# Altium PCB BCDto7-Bravo.PcbDoc
Units mil, origin at the board's own origin, x right, y up, seen from the top; angles counter-clockwise.
Board outline 3935 x 3935 mil, 2 copper layers (Top Layer, Bottom Layer); 26 components, 50 nets, 228 pads, 0 vias.
Unrouted connection lines stored in the file: 57.
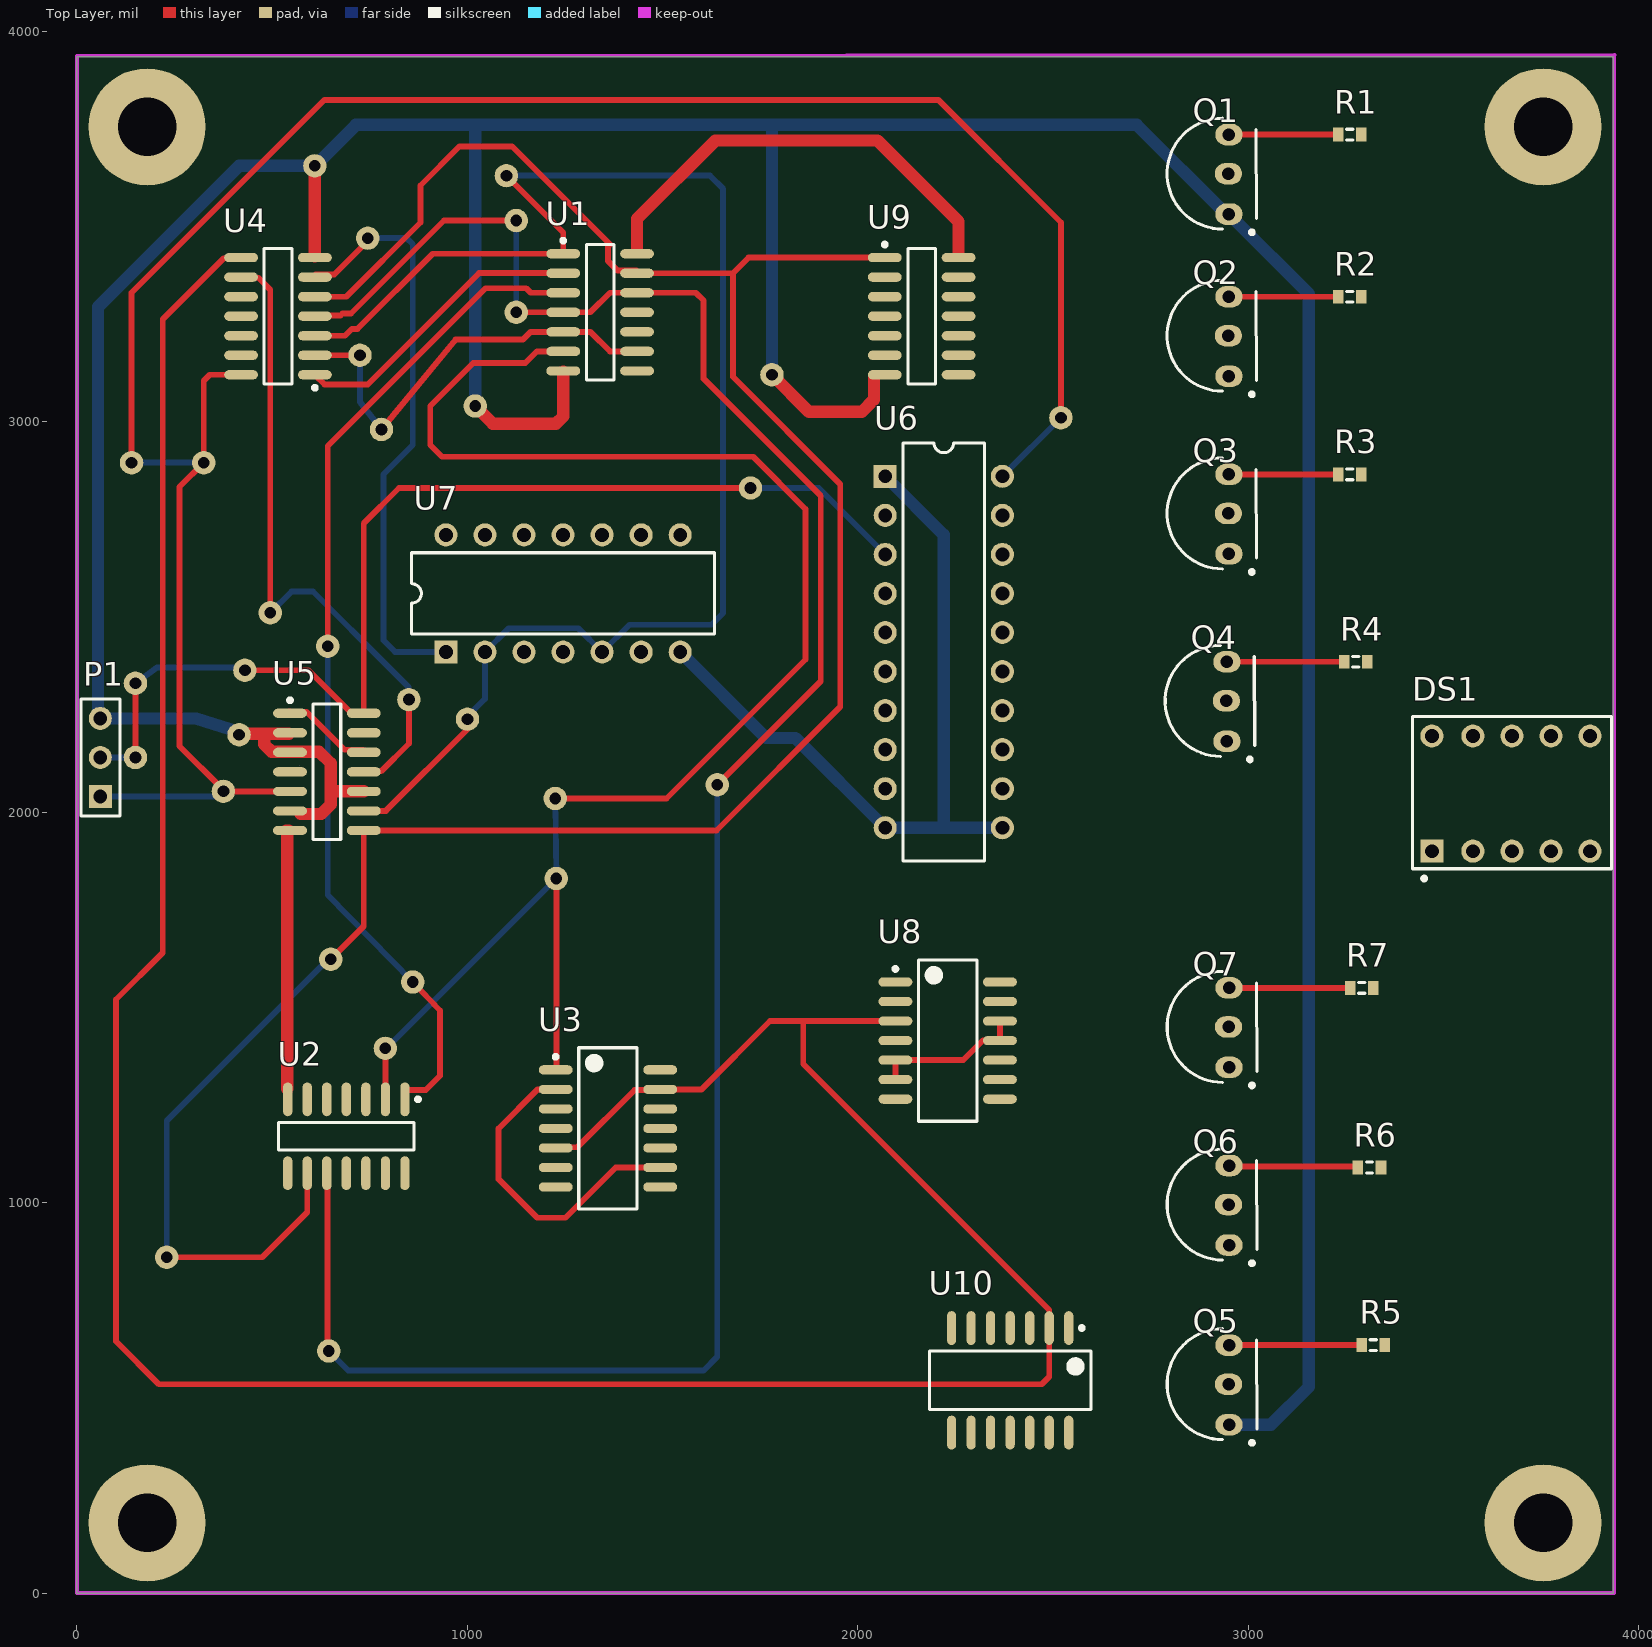
[diagram p0: Top Layer view]
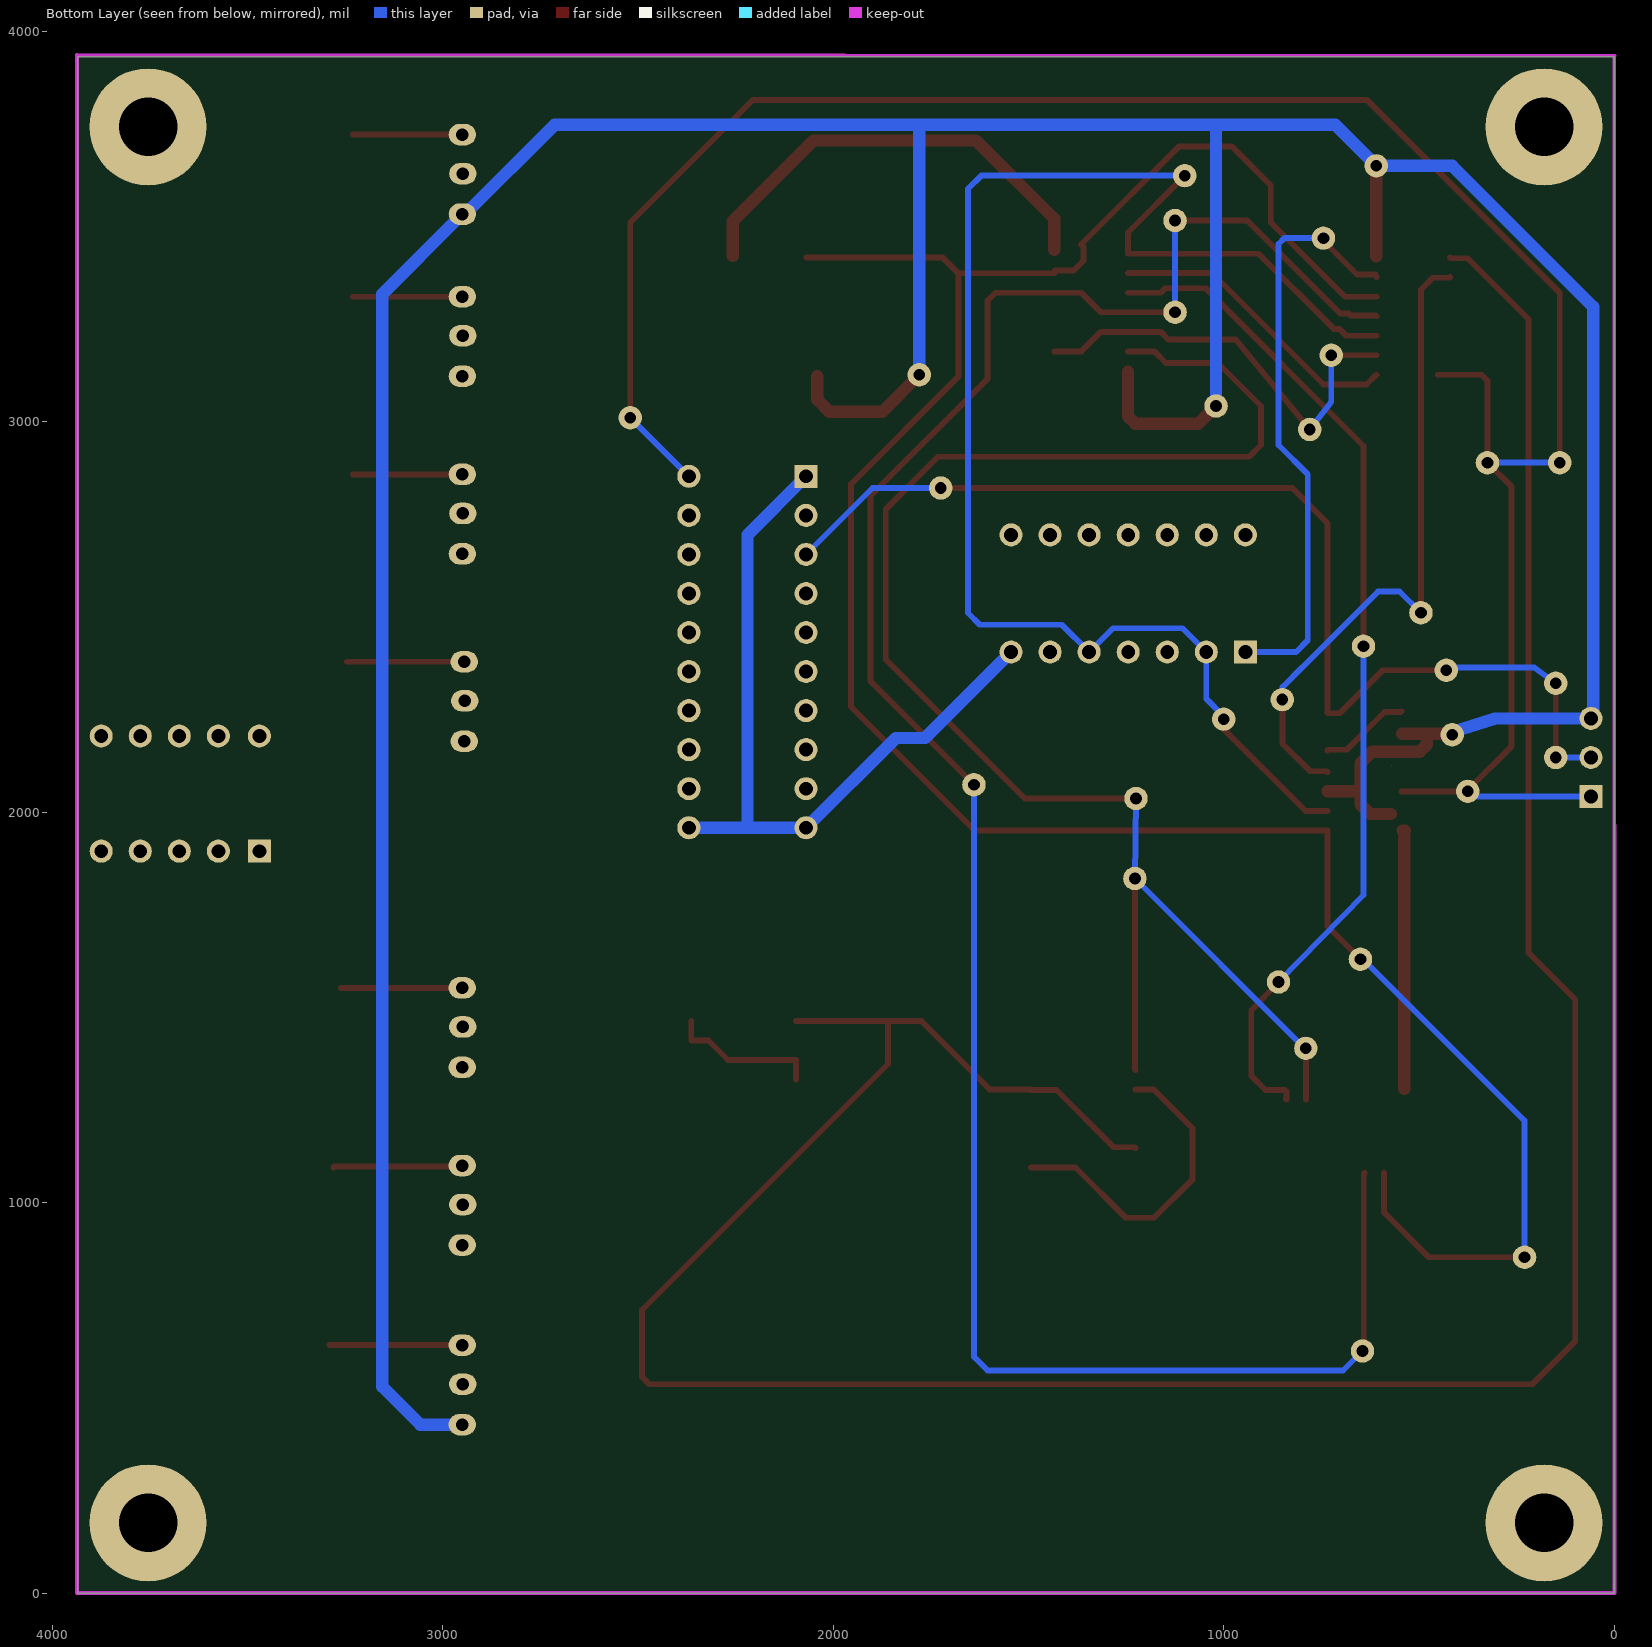
[diagram p1: Bottom Layer view, seen from below]

## Layer stack, top to bottom
Top Solder: solder mask 0.4, Solder Resist, Dk 3.5
Top Layer: signal copper 1.4
Dielectric 1: dielectric 12.6, FR-4, Dk 4.8
Bottom Layer: signal copper 1.4
Bottom Solder: solder mask 0.4, Solder Resist, Dk 3.5

## Board outline
0,3935 3935,3935 3935,0 0,0
cut-out: 570,2120

## Design rules (kind name [scope] priority, off if disabled: settings)
Clearance "Clearance ALL" [All] p1: gap=24 ignorepadtopadclearanceinfootprint=TRUE
Clearance "Clearance min" [All] p2: gap=10 ignorepadtopadclearanceinfootprint=TRUE
ComponentClearance [All] p1: gap=16 collisioncheckmode=3 verticalgap=0 showdistances=FALSE
HoleSize [All] p1: absolutevalues=TRUE maxlimit=125 minlimit=16 maxpercent=80.000 minpercent=20.000
HoleToHoleClearance [All] p1: gap=16 allowstackedmicrovias=TRUE
MinimumAnnularRing [All] p1: minimumring=10
MinimumSolderMaskSliver [All] p1: minsoldermaskwidth=8
PermittedLayers [All] p1: toplayerpermitted=TRUE bottomlayerpermitted=FALSE
PolygonConnect [All] p1: connectstyle=Relief reliefconductorwidth=10 reliefentries=4 polygonreliefangle="90 Angle" airgapwidth=10
RoutingVias [All] p1: holewidth=28 width=50 viastyle="Through Hole" minholewidth=28 minwidth=50 maxholewidth=28 maxwidth=50
SilkToSilkClearance [All] p1: silktosilkclearance=0
SilkToSolderMaskClearance [IsPad] p1: minsilkscreentomaskgap=0 clearancetoexposedcopper=TRUE
SolderMaskExpansion [All] p1: expansion=8
UnRoutedNet [All] p1: checkbadconnections=TRUE
Width "Width VCC" [InNet('VCC')] p1: maxlimit=10000 minlimit=31.55 preferedwidth=31.55
Width "Width GND" [InNet('GND')] p2: maxlimit=10000 minlimit=31.55 preferedwidth=31.55
Width "Width ALL" [All] p3: maxlimit=1000 minlimit=15 preferedwidth=15
23 further rules are at their usual default settings.

## Components (designator, comment, footprint, x,y, rotation, side; value= is the part's Value field where it differs from the comment)
DS1 "Dpy Amber-CA" A 3650,2030 r90 top
P1 "Header 3" HDR1X3 60,2040 r90 top
Q1 "2N3904" TO-92A 2948.94,3635 r0 top
Q2 "2N3904" TO-92A 2948.94,3220 r0 top
Q3 "2N3904" TO-92A 2948.94,2765 r0 top
Q4 "2N3904" TO-92A 2943.94,2285 r0 top
Q5 "2N3904" TO-92A 2949.17,535 r0 top
Q6 "2N3904" TO-92A 2949.17,995 r0 top
Q7 "2N3904" TO-92A 2949.17,1450 r0 top
R1 "Res3" J1-0603 3259.53,3735 r0 top value=220
R2 "Res3" J1-0603 3259.53,3320 r0 top value=220
R3 "Res3" J1-0603 3259.53,2865 r0 top value=220
R4 "Res3" J1-0603 3275.12,2385 r0 top value=220
R5 "Res3" J1-0603 3319.76,635 r0 top value=220
R6 "Res3" J1-0603 3309.88,1090 r0 top value=220
R7 "Res3" J1-0603 3290.24,1550 r0 top value=220
U1 "SN74LS00D" 751A-03_N 1340,3280 r0 top
U2 "SN74LS10D" D014_N 690,1170 r270 top
U3 "HD74LS20FP" PRSP0014DF-B_N 1360,1190 r0 top
U4 "SN74LS04D" 751A-03_N 515,3270 r180 top
U5 "DM74LS90M" M14A_N 640.26,2103.18 r0 top
U6 "SN74LS373N" 738-03 2220,2410 r270 top
U7 "SN74LS00N" 646-06 1245,2560 r0 top
U8 "HD74LS30FP" PRSP0014DF-B_N 2230,1415 r0 top
U9 "SN74LS00D" 751A-03_N 2163.43,3270 r0 top
U10 "HD74LS20FP" PRSP0014DF-B_N 2390,545 r270 top

## Footprints (in the part's own frame and the unit in brackets; to place one, negate y for a bottom-side part, rotate by r counter-clockwise, add the part's x,y. Pads: shape width x height; smd on the part's side, far side on the other; paste and mask are expansions set on the pad)
646-06 [mm] "DIP; 14 Leads; Row Spacing 7.62 mm; Pitch 2.54 mm"
  rect 1.5x1.5 hole 0.9: 1(-7.62,-3.81)
  round 1.5 hole 0.9: 2(-5.08,-3.81) 3(-2.54,-3.81) 4(0,-3.81) 5(2.54,-3.81) 6(5.08,-3.81) 7(7.62,-3.81) 8(7.62,3.81) 9(5.08,3.81) 10(2.54,3.81) 11(0,3.81) 12(-2.54,3.81) 13(-5.08,3.81) 14(-7.62,3.81)
  silkscreen extent -9.85,-2.65 9.85,2.65, body extent -9.84,-3.94 9.84,3.94, height 5.27
738-03 [mm] "DIP; 20 Leads; Row Spacing 7.62 mm; Pitch 2.54 mm"
  rect 1.5x1.5 hole 0.9: 1(-11.43,-3.81)
  round 1.5 hole 0.9: 2(-8.89,-3.81) 3(-6.35,-3.81) 4(-3.81,-3.81) 5(-1.27,-3.81) 6(1.27,-3.81) 7(3.81,-3.81) 8(6.35,-3.81) 9(8.89,-3.81) 10(11.43,-3.81) 11(11.43,3.81) 12(8.89,3.81) 13(6.35,3.81) 14(3.81,3.81) 15(1.27,3.81) 16(-1.27,3.81) 17(-3.81,3.81) 18(-6.35,3.81) 19(-8.89,3.81) 20(-11.43,3.81)
  silkscreen extent -13.6,-2.65 13.6,2.65, body extent -13.46,-4.06 17.65,3.81, height 5.27
751A-03_N [mm] "14-Pin Small Outline Integrated Circuit 1.27 mm Pitch, IPC Medium Density"
  oval 2.2x0.6 smd: 1(-2.4,3.81) 2(-2.4,2.54) 3(-2.4,1.27) 4(-2.4,0) 5(-2.4,-1.27) 6(-2.4,-2.54) 7(-2.4,-3.81) 8(2.4,-3.81) 9(2.4,-2.54) 10(2.4,-1.27) 11(2.4,0) 12(2.4,1.27) 13(2.4,2.54) 14(2.4,3.81)
  silkscreen extent -2.52,-4.4 0.9,4.78, body extent -3.01,-4.32 3.01,4.33, height 1.75
A [mm] "LED, 7-Segment Display, 7.62 mm, RHD; 10 Leads; Row Space 5.08 mm; Pitch 2.54 mm"
  rect 1.5x1.5 hole 0.9: 1(-3.302,4.572)
  round 1.5 hole 0.9: 2(-3.302,1.905) 3(-3.302,-0.635) 4(-3.302,-3.175) 5(-3.302,-5.715) 6(4.191,-5.715) 7(4.191,-3.175) 8(4.191,-0.635) 9(4.191,1.905) 10(4.191,4.572)
  silkscreen extent -5.2,-7.11 5.46,5.84, body extent -4.49,-7.16 5.51,5.84, height 7
D014_N [mm] "SOIC, 14-Leads, Body 8.7x3.9mm, Pitch 1.27mm, IPC Medium Density"
  oval 2.2x0.6 smd: 1(-2.4,3.81) 2(-2.4,2.54) 3(-2.4,1.27) 4(-2.4,0) 5(-2.4,-1.27) 6(-2.4,-2.54) 7(-2.4,-3.81) 8(2.4,-3.81) 9(2.4,-2.54) 10(2.4,-1.27) 11(2.4,0) 12(2.4,1.27) 13(2.4,2.54) 14(2.4,3.81)
  silkscreen extent -2.52,-4.4 0.9,4.79, body extent -1.95,-4.33 1.95,4.33, height 1.75
HDR1X3 [mm] "Connector; Header; 3 Position"
  rect 1.5x1.5 hole 0.9: 1(0,0)
  round 1.5 hole 0.9: 2(2.54,0) 3(5.08,0)
  silkscreen extent -1.27,-1.27 6.35,1.27
J1-0603 [mm] "Chip Resistor, Body 1.6x0.8mm, IPC High Density"
  rect 0.7x0.9 smd: 1(-0.75,0) 2(0.75,0)
  silkscreen extent -0.2,-0.35 0.2,0.35, body extent -0.85,-0.48 0.85,0.48, height 0.9
M14A_N [mm] "14-Pin Small Outline Integrated Circuit 1.27 mm Pitch, IPC Medium Density"
  oval 2.2x0.6 smd: 1(-2.4,3.81) 2(-2.4,2.54) 3(-2.4,1.27) 4(-2.4,0) 5(-2.4,-1.27) 6(-2.4,-2.54) 7(-2.4,-3.81) 8(2.4,-3.81) 9(2.4,-2.54) 10(2.4,-1.27) 11(2.4,0) 12(2.4,1.27) 13(2.4,2.54) 14(2.4,3.81)
  silkscreen extent -2.52,-4.4 0.9,4.78, body extent -1.95,-4.33 1.95,4.33, height 1.75
PRSP0014DF-B_N [mm] "SOP, 14-Leads, Body 10.06x5.5mm, Pitch 1.27mm, IPC Medium Density"
  oval 2.2x0.6 smd: 1(-3.4,3.81) 2(-3.4,2.54) 3(-3.4,1.27) 4(-3.4,0) 5(-3.4,-1.27) 6(-3.4,-2.54) 7(-3.4,-3.81) 8(3.4,-3.81) 9(3.4,-2.54) 10(3.4,-1.27) 11(3.4,0) 12(3.4,1.27) 13(3.4,2.54) 14(3.4,3.81)
  silkscreen extent -3.52,-5.25 1.9,5.25, body extent -2.7,-5.25 2.7,5.25, height 2.2
TO-92A [mil] "TO, Flat Index; 3 In-Line, Axial Leads; Body Dia. 4.5mm; Leads 0.51 x 0.48 mm (max)"
  oval 69.8x55 hole 32: 1(1.3,-103.57) 2(0,0) 3(1.3,100)
  silkscreen extent -157,-155 72,142, body extent -86,-111 56,111, height 390

## Part data
DS1: "7.62 mm Black Surface Orange 7-Segment Display: CA, RH DP", Colour=Orange, ComponentLink1Description="Manufacturer Link", ComponentLink1URL=http://www.agilent.com/, DatasheetVersion=19-Feb-2002, LatestRevisionDate=17-Dec-2003, LatestRevisionNote="Schematic revised, PCB Footprint replaced.", MinimumIntensity="354 ucd", Note="IF = 5 mA", PackageDescription="LED, 7-Segment Display, 7.62 mm, RHD; 10 Leads; Row Space 5.08 mm; Pitch 2.54 mm", PackageReference=A, PackageVersion=11-Feb-2002, Published=8-Jun-2000, Publisher="Altium Limited"
P1: "Header, 3-Pin", LatestRevisionDate=17-Jul-2002, LatestRevisionNote="Re-released for DXP Platform.", Publisher="Altium Limited"
Q1 Q2 Q3 Q4 Q5 Q6 Q7: "NPN General Purpose Amplifier", ComponentLink1Description="Manufacturer Link", ComponentLink1URL=http://www.fairchildsemi.com/, ComponentLink2Description=Datasheet, ComponentLink2URL=http://www.fairchildsemi.com/ds/2N%2F2N3904.pdf, DatasheetVersion=1997, LatestRevisionDate=15-Jan-2003, LatestRevisionNote="PCB Footprint 'BCY-W3/D4.7' replaced", PackageDescription="TO, Flat Index; 3 In-Line, Axial Leads; Body Dia. 4.5mm; Leads 0.51 x 0.48 mm (max)", PackageReference=TO-92A, PackageVersion=Sep-1998, Published=8-Jun-2000, Publisher="Altium Limited"
R1 R2 R3 R4 R5 R6 R7: "Resistor", LatestRevisionDate=29-May-2009, LatestRevisionNote="IPC-7351 Footprint Added.", PackageDescription="Chip Resistor", PackageReference=J1-0603, Published=8-Jun-2000, Publisher="Altium Limited"
U1 U7 U9: "Quad 2-Input NAND Gate", ComponentAvailability="Not for New Design", ComponentLink1Description="Manufacturer Link", ComponentLink1URL=http://www.onsemi.com/, ComponentLink2Description=Datasheet, ComponentLink2URL=http://www.onsemi.com/pub/Collateral/SN74LS00-D.PDF, DatasheetVersion=Dec-1999, Published=15-Apr-2002, Publisher="Altium Limited"
  U1 U9: Code_IPC=SOIC127P600-14, Code_JEDEC=MS-012-AB, LatestRevisionDate=13-Apr-2006, LatestRevisionNote="IPC-7351 Footprint Added.", PackageDescription="14-Pin Small Outline Integrated Circuit 1.27 mm Pitch", PackageReference=751A-03
  U7: PackageDescription="DIP; 14 Leads; Row Spacing 7.62 mm; Pitch 2.54 mm", PackageReference=646-06, PackageVersion=1995
U2: "Triple 3-Input Positive-NAND Gate", Code_IPC=SOIC127P600-14, ComponentLink1Description="Manufacturer Link", ComponentLink1URL=http://www.ti.com/, ComponentLink2Description=Datasheet, ComponentLink2URL=http://www-s.ti.com/sc/ds/sn74ls10.pdf, DatasheetVersion=Mar-1988, LatestRevisionDate=13-Apr-2006, LatestRevisionNote="IPC-7351 Footprint Added.", PackageDescription="14-Pin Small Outline Integrated Circuit 1.27 mm Pitch", PackageReference=D014, PackageVersion=Jan-1998, Published=8-Jun-2000, Publisher="Altium Limited"
U3 U10: "Dual 4-Input NAND Gates", Code_JEITA=P-SOP14-5.5x10.06-1.27, ComponentLink1Description="Manufacturer Link", ComponentLink1URL=http://sg.renesas.com/fmwk.jsp?cnt=hd74ls_root.jsp&fp=/products/standard_ic/general_purpose_logic/5v_standard_logic/hd74ls/, ComponentLink2Description=Datasheet, ComponentLink2URL=http://documentation.renesas.com/eng/products/logic/rej03d0400_hd74ls20.pdf, ComponentLink3Description="Packaging Specification", ComponentLink3URL=http://sg.renesas.com/media/products/common_info/package/pdf/ic/code/prsp0014df_b.pdf, DatasheetVersion="Rev.2.00, Feb-2005", PackageDescription="14-Pin Plastic Small Outline Package, 10.06 x 5.5 mm Body, 1.27 mm Pitch", PackageReference=PRSP0014DF-B, PackageVersion=Sep-2005, Published=10-Feb-2010, Publisher="Altium Limited"
U4: "Hex Inverter", Code_IPC=SOIC127P600-14, Code_JEDEC=MS-012-AB, ComponentLink1Description="Manufacturer Link", ComponentLink1URL=http://www.onsemi.com/, ComponentLink2Description=Datasheet, ComponentLink2URL=http://www.onsemi.com/pub/Collateral/SN74LS04-D.PDF, DatasheetVersion=1999, LatestRevisionDate=13-Apr-2006, LatestRevisionNote="IPC-7351 Footprint Added.", PackageDescription="14-Pin Small Outline Integrated Circuit 1.27 mm Pitch", PackageReference=751A-03, Published=15-Apr-2002, Publisher="Altium Limited"
U5: "Decade and Binary Counter", Code_IPC=SOIC127P600-14, ComponentLink1Description="Manufacturer Link", ComponentLink1URL=http://www.fairchildsemi.com/, DatasheetVersion=Mar-1998, LatestRevisionDate=13-Apr-2006, LatestRevisionNote="IPC-7351 Footprint Added.", Note="NC pins 4 and 13 are not drawn.", PackageDescription="14-Pin Small Outline Integrated Circuit 1.27 mm Pitch", PackageReference=M14A, PackageVersion=2000, Published=17-Jul-2002, Publisher="Altium Limited"
U6: "Octal Transparent Latch with 3-State Outputs", Code_JEDEC=MS-001-AD, ComponentLink1Description="Manufacturer Link", ComponentLink1URL=http://www.onsemi.com/, ComponentLink2Description=Datasheet, ComponentLink2URL=http://www.onsemi.com/pub/Collateral/SN74LS373-D.PDF, DatasheetVersion=Dec-1999, PackageDescription="DIP; 20 Leads; Row Spacing 7.62 mm; Pitch 2.54 mm", PackageReference=738-03, PackageVersion=1996, Published=15-Apr-2002, Publisher="Altium Limited"
U8: "8-Input NAND Gate", Code_JEITA=P-SOP14-5.5x10.06-1.27, ComponentLink1Description="Manufacturer Link", ComponentLink1URL=http://sg.renesas.com/fmwk.jsp?cnt=hd74ls_root.jsp&fp=/products/standard_ic/general_purpose_logic/5v_standard_logic/hd74ls/, ComponentLink2Description=Datasheet, ComponentLink2URL=http://documentation.renesas.com/eng/products/logic/rej03d0404_hd74ls30.pdf, ComponentLink3Description="Packaging Specification", ComponentLink3URL=http://sg.renesas.com/media/products/common_info/package/pdf/ic/code/prsp0014df_b.pdf, DatasheetVersion="Rev.2.00, Feb-2005", PackageDescription="14-Pin Plastic Small Outline Package, 10.06 x 5.5 mm Body, 1.27 mm Pitch", PackageReference=PRSP0014DF-B, PackageVersion=Sep-2005, Published=10-Feb-2010, Publisher="Altium Limited"

## Free pads (board coordinates)
  round 299.8 hole 150: 13(180,180) 13(180,3755) 13(3755,180) 13(3755,3755)
  round 60 hole 30: 14(415.26,2198.18) 15(375.26,2053.18) 16(1000.26,2238.18) 18(150,2330) 19(150,2140) 20(650.26,1623.17) 21(230,860) 22(1725,2830) 23(2520,3010) 24(430.26,2363.18) 27(609.49,3655) 28(495.32,2510.32) 29(850.26,2288.18) 31(140,2895) 32(325,2895) 33(1020,3040) 34(1780,3120) 37(1125,3515) 38(1125,3280) 41(745,3470) 42(1640,2070) 43(645,620) 44(725,3170) 45(780,2980) 46(1100,3630) 48(642.42,2425) 49(860,1565) 50(1225,2035) 51(1227.79,1830) 52(790,1395)

## Nets (pads, with @x,y where several pads share a name; then routed paths per layer and width w, separated by ;. In a path a pad name is that pad's centre, name@x,y a point inside that pad or via, vN(x,y) a via of type N, cw(c..) or ccw(c..) an arc to the next point about the centre after c; other vN are vias at no path point)
a: DS1.10 R1.2
ax: U2.12 U6.4
b: DS1.9 R3.2
B1: Q1.2 U6.2
B2: Q2.2 U6.5
B3: Q3.2 U6.6
B4: Q4.2 U6.9
B5: Q5.2 U6.12
B6: Q6.2 U6.15
B7: Q7.2 U6.16
bx: U2.6 U6.8
c: DS1.8 R6.2
C1: Q1.3 R1.1 | length 279.8
  Top Layer w15: Q1.3 R1.1
C2: Q2.3 R2.1 | length 279.8
  Top Layer w15: Q2.3 R2.1
C3: Q3.3 R3.1 | length 279.8
  Top Layer w15: Q3.3 R3.1
C4: Q4.3 R4.1 | length 300.4
  Top Layer w15: Q4.3 R4.1
C5: Q5.3 R5.1 | length 339.8
  Top Layer w15: Q5.3 R5.1
C6: Q6.3 R6.1 | length 332
  Top Layer w15: Q6.3 2952.97,1092.5 3277.85,1092.5 R6.1
C7: Q7.3 R7.1 | length 310.2
  Top Layer w15: Q7.3 R7.1
CP: P1.2 pad.18 pad.19 pad.22 pad.24 U5.14 U6.3 | length 2872
  Top Layer w15: pad.19 pad.18 ; pad.24 593.25,2363.18 703.25,2253.18 U5.14 U5.14@734.74,2258.18 ; 734.49,2265 734.49,2739.49 825,2830 pad.22@1745,2830
  Bottom Layer w15: P1.2@53.94,2140 pad.19 ; pad.18 205,2370 pad.24@430,2370 ; pad.22 1900,2830 U6.3
cx: U6.17 U8.8
d: DS1.5 R5.2
DP: DS1.7 U6.19
dx: U6.14 U7.11
e: DS1.4 R2.2
ex: U3.6 U6.7
f: DS1.2 R7.2
fx: U6.18 U10.6
g: DS1.3 R4.2
GND: P1.3 pad.14 pad.27 pad.33 pad.34 Q1.1 Q2.1 Q3.1 Q4.1 Q5.1 Q6.1 Q7.1 U1.7 U2.7 U4.7 U5.2 U5.3 U5.6 U5.7 U5.10 U6.1 U6.10 U6.11 U7.7 U9.7 | length 13545.5
  Top Layer w31.55: pad.14 417.76,2200.68 480.51,2200.68 ; U5.7@536.28,1953.17 542.63,1953.17 538.67,1949.21 U5.7@538.67,1943.17 ; U2.7@538.41,1292.02 U5.7@538.41,1950 ; U5.2@543.27,2200.68 480.51,2200.68 ; U5.6@572.79,1995 625.63,1995 650,2019.37 650,2055 ; U4.7@609.49,3423.75 pad.27 ; U5.10 651.83,2053.18 650,2055 ; pad.33 1065,2995 1227.03,2995 1245.51,3013.48 U1.7@1245.51,3128.41 ; pad.34 1875,3025 2010,3025 2041.4,3056.4 U9.7@2041.4,3116.04 ; 480.51,2200.68 480,2200.16 480,2173.48 498.48,2155 547.11,2155 547.35,2154.76 620.26,2154.76 650,2125.02 650,2055
  Bottom Layer w31.55: pad.14@415,2205 305,2240 P1.3 53.94,2240 53.94,3293.94 415,3655 pad.27 714.49,3760 1015,3760 ; pad.33 1020,3755 1015,3760 ; U7.7 1765,2190 1840,2190 U6.10 2220,1960 ; pad.34 1780,3760 ; U6.1 2220,2710 2220,1960 ; U6.11 2220,1960 ; Q5.1 3057.94,431.43 3155,528.48 3155,3326.66 2962.12,3519.54 2962.12,3520.59 2951.29,3531.43 Q1.1 2942.84,3531.43 2714.26,3760 1780,3760 ; 1015,3760 1780,3760
gx: U3.8 U6.13
N1: pad.48 pad.49 U1.3 U2.1 | length 2653.1
  Top Layer w15: pad.48 642.42,2937.58 1046.35,3341.5 1150.47,3341.5 1161.97,3330 U1.3 ; U2.1@841.65,1266.14 U2.1 840,1284.5 843.98,1288.48 893.48,1288.48 930,1325 930,1491.65 pad.49 pad.49@841.65,1571.65
  Bottom Layer w15: pad.48 642.42,1787.58 pad.49
N2: pad.50 pad.51 pad.52 U1.6 U2.2 U3.1 | length 4146.2
  Top Layer w15: U2.2 pad.52 ; pad.50 1510,2035 1866,2391 1866,2775.97 1731.97,2910 935,2910 905,2940 905,3040 1015,3150 1148.11,3150 1178.11,3180 U1.6 ; U3.1 1227.79,1341.65 pad.51
  Bottom Layer w15: pad.52@790,1392.21 pad.51 pad.50
N3: U1.11 U3.2 U3.9 | length 825.7
  Top Layer w15: U3.2 1180,1290 1080,1190 1080,1060 1178.79,961.21 1251.21,961.21 1380,1090 U3.9
N4: U1.8 U3.4
N5: U3.10 U7.3 U8.4
N6: U3.5 U3.13 U4.8 U8.3 U10.2 | length 7552.9
  Top Layer w15: U4.8 418.86,3418.35 376.12,3418.35 220,3262.24 220,1640 100,1520 100,645 210,535 2471.21,535 2490,553.79 U10.2 2490,725 1860,1355 1860,1465 ; U3.5 1227.79,1141.65 1281.68,1141.65 1428.38,1288.35 1492.21,1288.35 U3.13 1600,1290 1775,1465 1860,1465 ; U8.3 1860,1465
N7: U3.12 U7.6 U7.13 U8.2
N8: U7.8 U7.12 U8.1 U10.1
N9: U2.8 U8.5 U8.6 U8.11 U8.12 | length 388.4
  Top Layer w15: U8.6 U8.5 2270,1365 2320,1415 U8.11 U8.12
N10: U9.3 U10.5
N11: pad.37 pad.38 pad.42 pad.43 U1.4 U1.12 U2.10 U4.4 U10.4 | length 5787.8
  Top Layer w15: U4.4 611.14,3271.65 674.97,3271.65 680.01,3276.69 701.84,3276.69 940.15,3515 pad.37 ; U2.10 641.65,1073.86 641.65,623.35 pad.43 ; pad.38 U1.4 1315,3280 1365,3330 U1.12 1585,3330 1605,3310 1605,3110 1905,2810 1905,2335 pad.42
  Bottom Layer w15: pad.43 695,570 1605,570 1640,605 pad.42 ; pad.38 pad.37
N12: pad.44 pad.45 U1.5 U1.9 U2.4 U4.2 U7.4 U7.9 | length 1116.3
  Top Layer w15: U4.2 pad.44 ; pad.45 970,3210 1141.97,3210 1161.97,3230 U1.5 1315,3230 1365,3180 U1.9
  Bottom Layer w15: pad.44 725,3050 pad.45
N13: pad.41 U2.5 U4.6 U7.1 U7.10 | length 1523.7
  Top Layer w15: U4.6 611.14,3371.65 611.14,3376.47 629.07,3376.47 629.28,3376.69 658.92,3376.69 745,3462.76 pad.41
  Bottom Layer w15: pad.41 845,3470 860,3455 860,2940 785,2865 785,2440 815,2410 U7.1
QA: U1.2 U2.11 U4.1 U5.1 U5.12 U9.2 | length 996.3
  Top Layer w15: U5.1@545.26,2258.18 546.91,2256.53 588.47,2256.53 685.18,2159.82 733.61,2159.82 U5.12@735.26,2158.18 ; U4.1 634.49,3095 744.69,3095 1030.19,3380.5 1245.01,3380.5 U1.2
QB: pad.16 pad.46 U1.1 U2.3 U4.3 U5.9 U7.2 U7.5 | length 3902.1
  Top Layer w15: U4.3 686.74,3220 704.42,3237.69 718.75,3237.69 911.06,3430 U1.1 1245.51,3484.49 pad.46 ; U5.9 791.17,2003.17 1000.26,2212.26 pad.16
  Bottom Layer w15: pad.16@1000,2245 1045,2290 U7.2 1106.03,2471.03 1283.97,2471.03 U7.5 1415,2480 1625,2480 1655,2510 1655,3596.21 1621.21,3630 pad.46
QC: pad.20 pad.21 U1.10 U1.13 U2.9 U2.13 U4.5 U5.8 U9.1 | length 6254.1
  Top Layer w15: pad.21 475,860 590,975 U2.9 ; U4.5 690,3320 880,3510 880,3605 980,3705 1114.53,3705 1365.63,3453.89 1359.68,3447.94 1359.68,3412.06 1385.05,3386.69 1432.84,3386.69 1432.84,3381.65 U1.13 1680,3380 ; pad.20 734.74,1707.66 U5.8 1638.17,1953.17 1955,2270 1955,2840 1680,3115 1680,3380 ; U9.1 1720,3420 1680,3380
  Bottom Layer w15: pad.21 230,1210 pad.20@650,1630
QD: pad.28 pad.29 U4.9 U5.11 | length 1677.9
  Top Layer w15: U4.9 422.16,3368.35 464.91,3368.35 495.32,3337.94 pad.28 pad.28@495,2510 ; U5.11 736.39,2104.82 779.14,2104.82 850.26,2175.94 pad.29
  Bottom Layer w15: pad.28 550,2565 604.85,2565 798.85,2371 799,2371 850,2320 pad.29@850,2295
VCC: U1.14 U2.14 U7.14 U9.14 | length 1160.5
  Top Layer w31.55: U1.14@1434.49,3440 1434.49,3519.49 1635,3720 2050.46,3720 2257.91,3512.54 U9.14@2257.91,3423.96
VDD: DS1.1 DS1.6 P1.1 pad.15 pad.23 pad.31 pad.32 U4.14 U5.5 U6.20 | length 5798.8
  Top Layer w15: pad.31 140,3330 634.02,3824.02 2205.98,3824.02 2520,3510 pad.23 ; pad.15@375,2060 372.01,2060 262.96,2169.05 262.96,2832.96 pad.32 325,3105 340,3120 U4.14 U4.14@452.01,3120 ; pad.15 U5.5
  Bottom Layer w15: P1.1@53.94,2040 P1.1 355,2040 pad.15@375,2060 ; pad.31 pad.32 ; U6.20 pad.23
pads on no net: U3.3 U3.7 U3.11 U3.14 U4.10 U4.11 U4.12 U4.13 U5.4 U5.13 U8.7 U8.9 U8.10 U8.13 U8.14 U9.4 U9.5 U9.6 U9.8 U9.9 U9.10 U9.11 U9.12 U9.13 U10.3 U10.7 U10.8 U10.9 U10.10 U10.11 U10.12 U10.13 U10.14

## Keep-outs
Keep-Out Layer:
  lines w10: 0,3937.01 3937.28,3939.22 ; 0.27,3937.01 0,0 3937.01,0 3937.01,3939.22

## Other copper
Top Layer:
  region: 0,0